# EAGLE board EPC (EAGLE 9.6.2), part 1 of 2
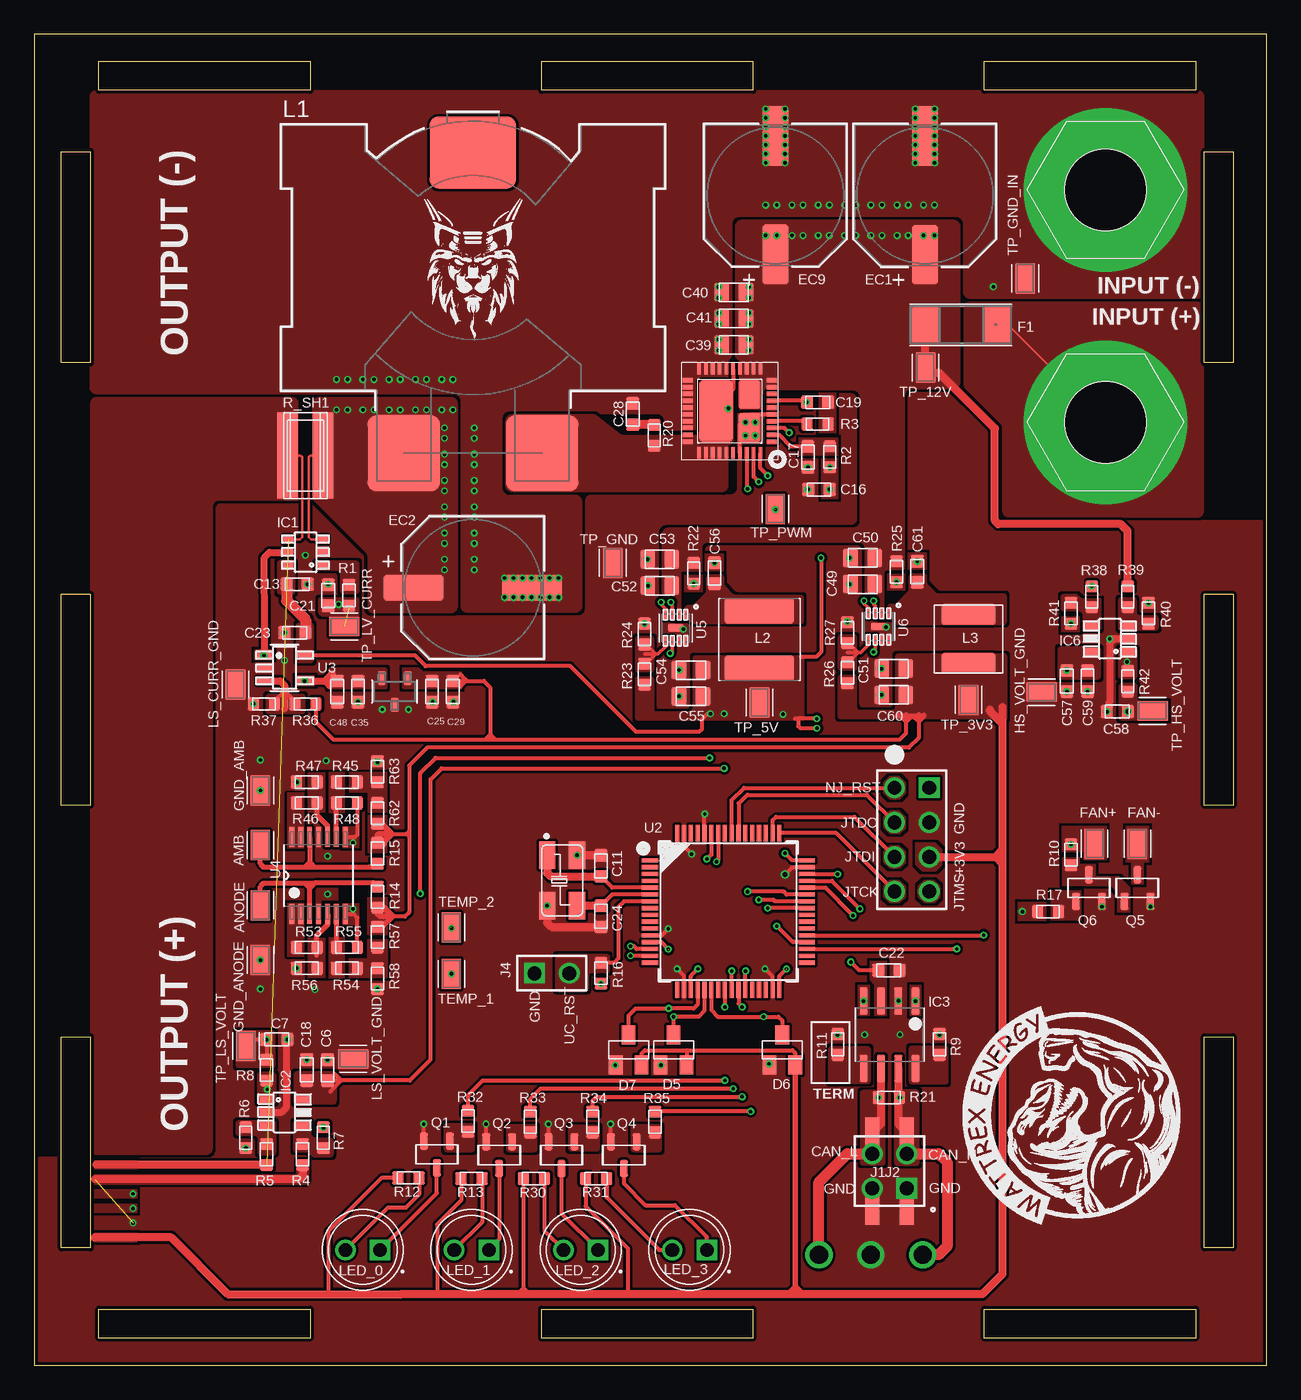
[diagram p0: board, top side]
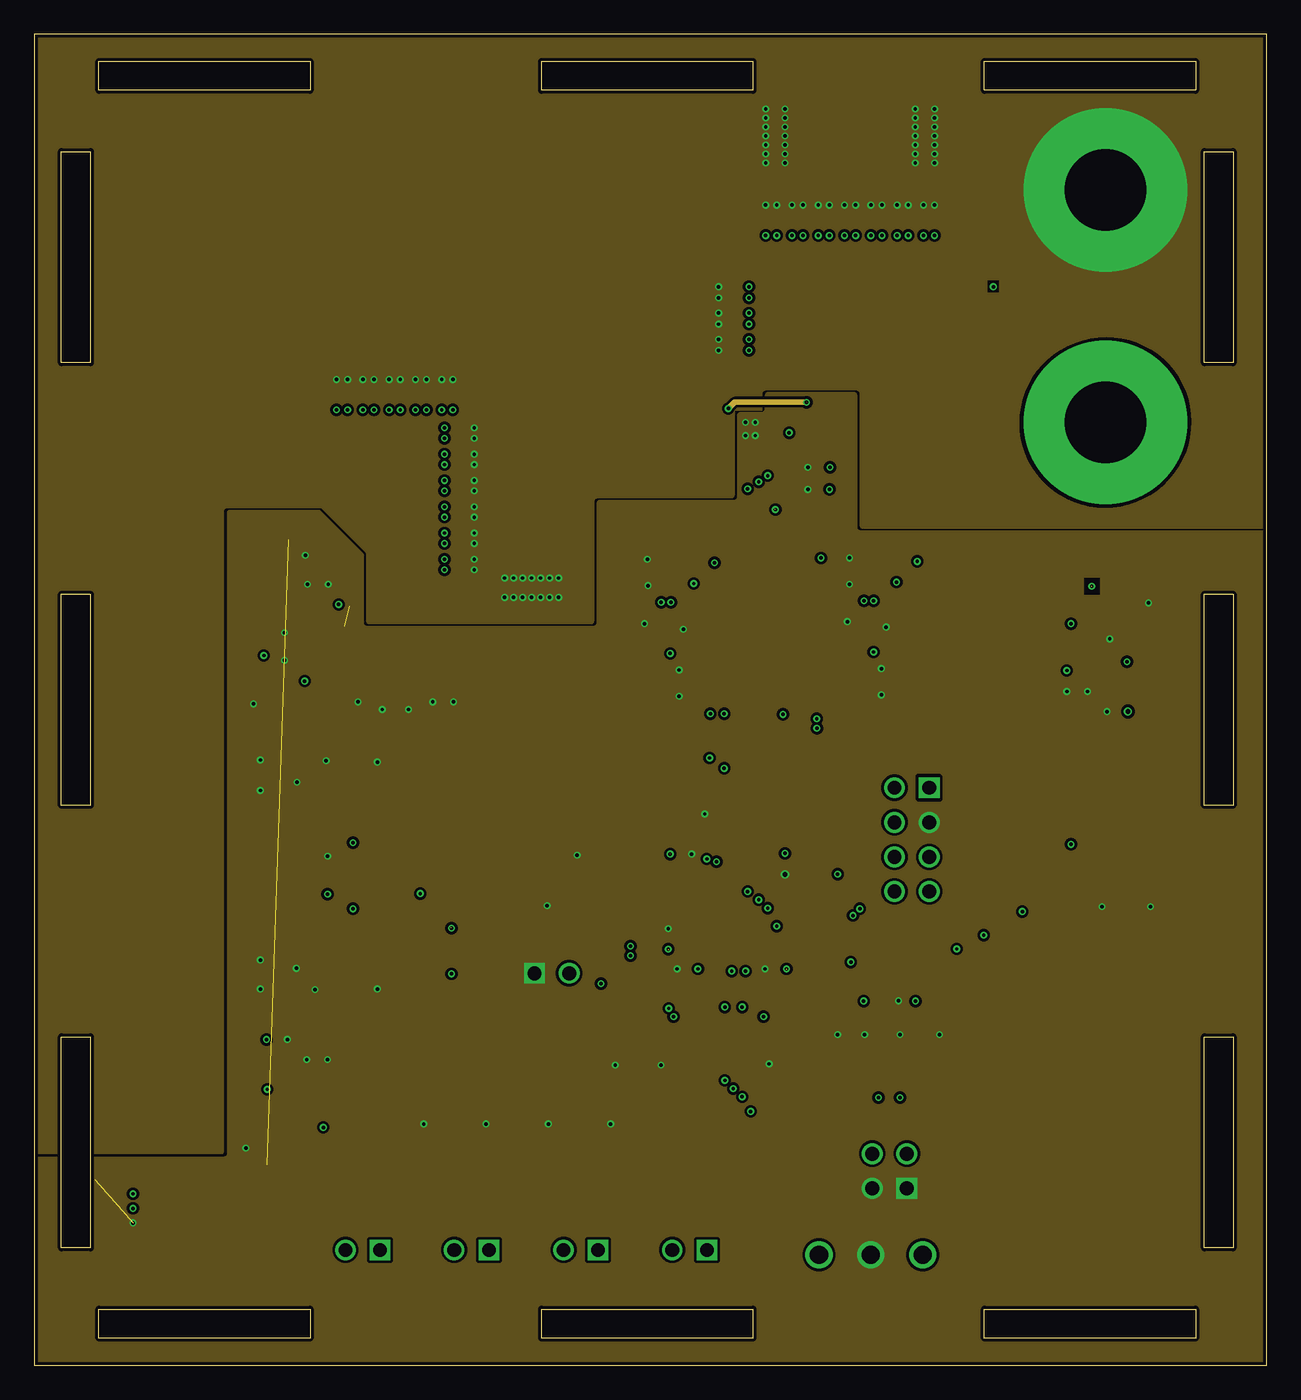
[diagram p1: board, inner layer PGND]
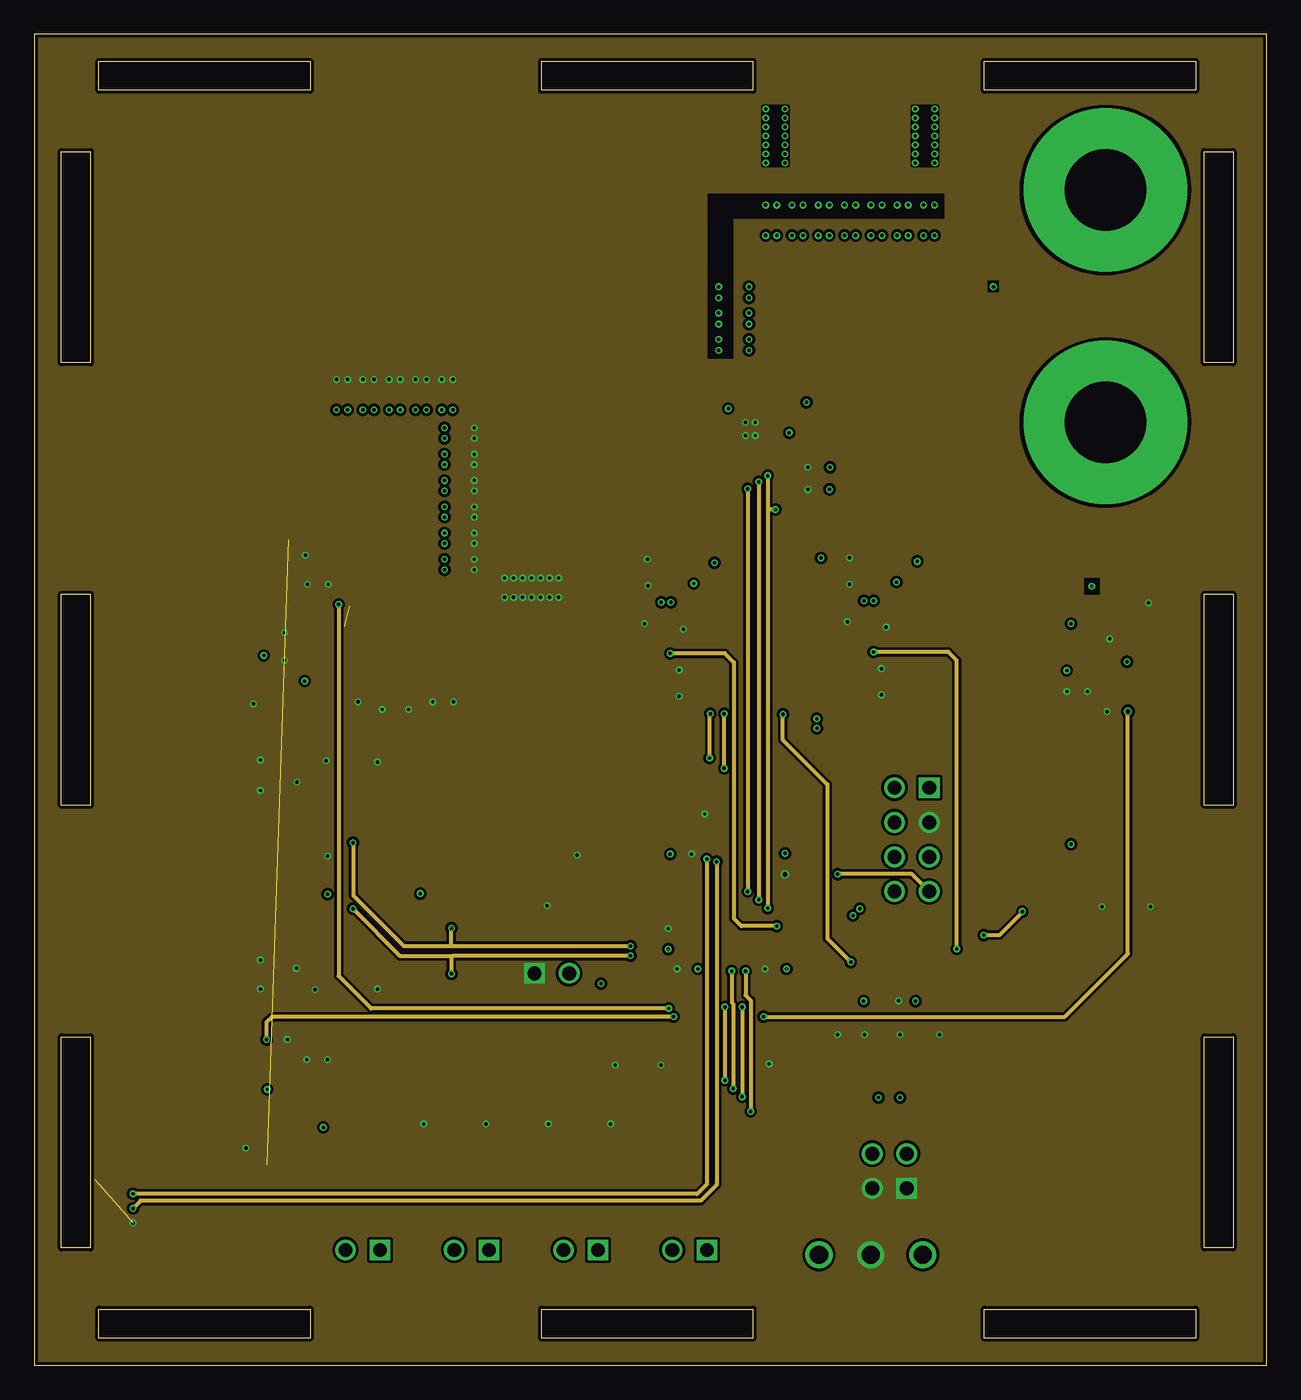
[diagram p2: board, inner layer CGND]
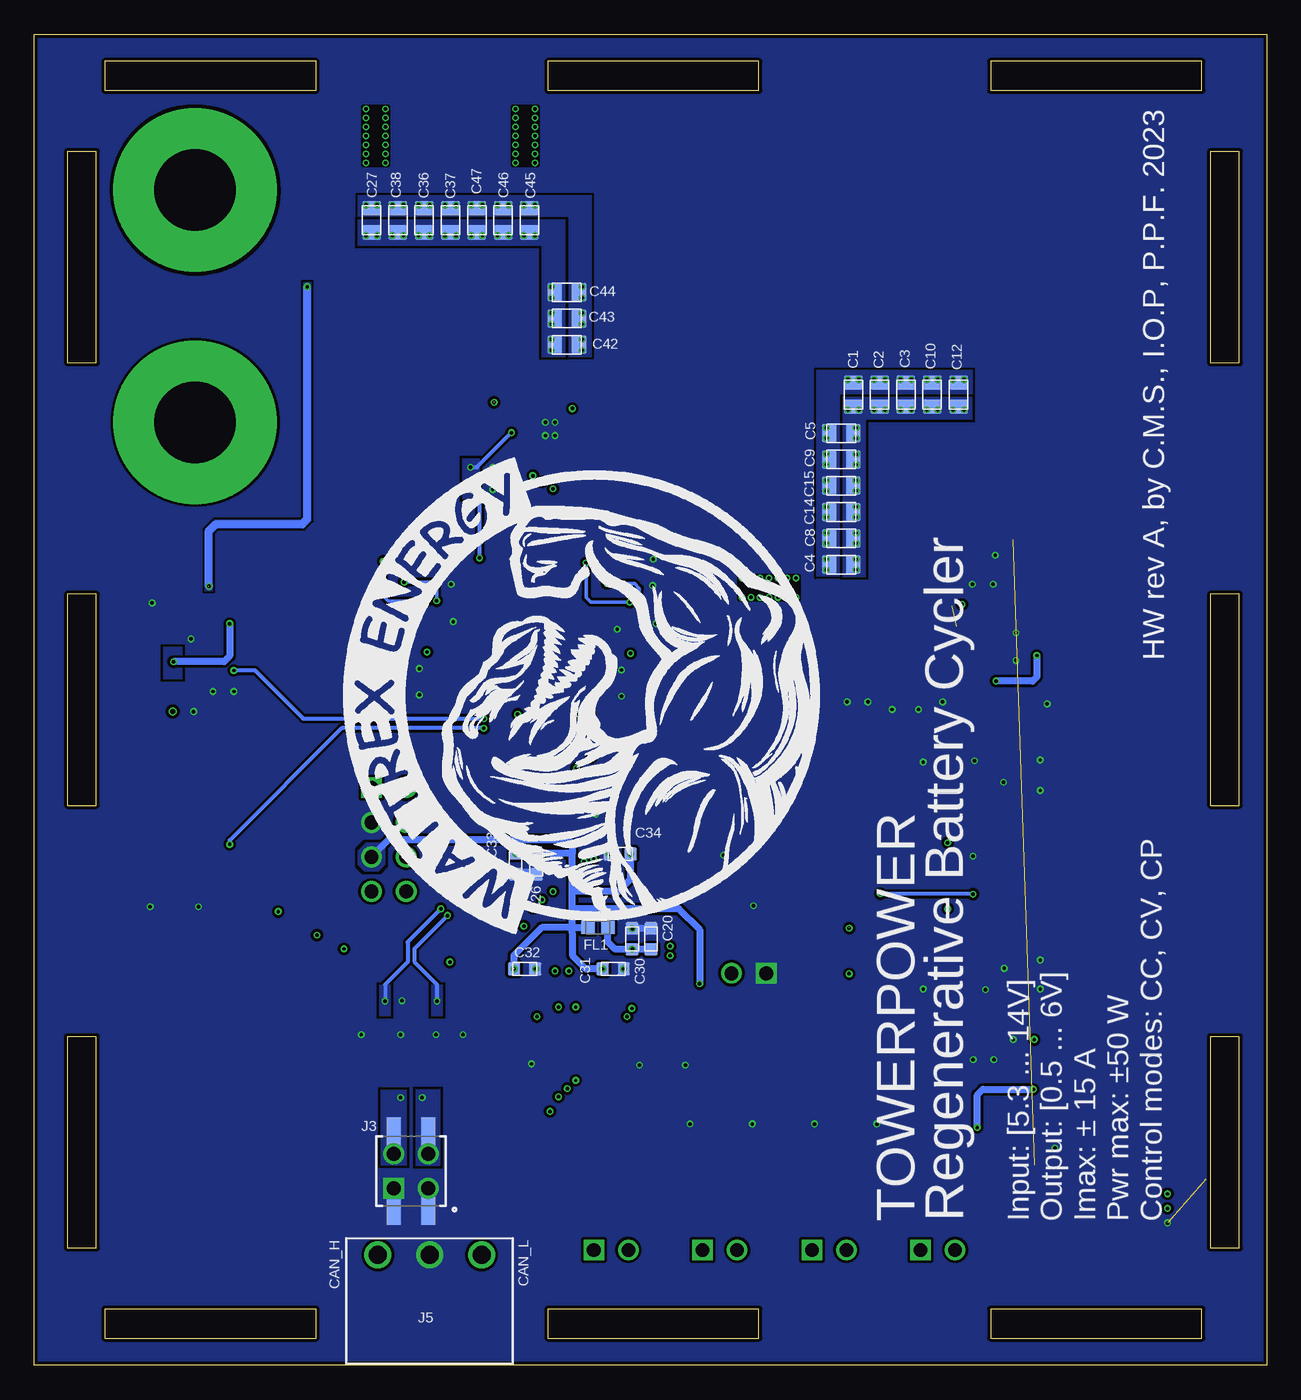
[diagram p3: board, bottom side, seen from below]

Size 90.46 x 97.75 mm. Coordinates in mm from the lower left corner, seen from the top.
Outline: 37.25,2 37.25,4.12 52.75,4.12 52.75,2 37.25,2
Outline: 85.88,73.62 85.88,89.12 88,89.12 88,73.62 85.88,73.62
Outline: 2,73.62 2,89.12 4.12,89.12 4.12,73.62 2,73.62
Outline: 4.75,93.62 4.75,95.75 20.25,95.75 20.25,93.62 4.75,93.62
Outline: 2,8.62 2,24.12 4.12,24.12 4.12,8.62 2,8.62
Outline: 4.75,2 4.75,4.12 20.25,4.12 20.25,2 4.75,2
Outline: 2,41.12 2,56.62 4.12,56.62 4.12,41.12 2,41.12
Outline: 37.25,93.62 37.25,95.75 52.75,95.75 52.75,93.62 37.25,93.62
Outline: 85.88,41.12 85.88,56.62 88,56.62 88,41.12 85.88,41.12
Outline: 69.75,2 69.75,4.12 85.25,4.12 85.25,2 69.75,2
Outline: 85.88,8.62 85.88,24.12 88,24.12 88,8.62 85.88,8.62
Outline: 69.75,93.62 69.75,95.75 85.25,95.75 85.25,93.62 69.75,93.62
Outline: 0,97.75 0,0 90.46,0 90.46,97.75 0,97.75
Copper layers (1+2*3+16): PWR 0.035mm / dielectric 0.36mm / PGND 0.07mm / dielectric 0.71mm / CGND 0.07mm / dielectric 0.36mm / SGND 0.035mm
Design rules "eC_4Layer_PClass4_BaseCopperO35-I70 *": minimum track width 0.2mm, minimum drill 0.25mm, track to track 0.2mm, track to pad 0.2mm, pad to pad 0.2mm, via to via 0.2mm, smd to smd 0mil, copper to edge 0.25mm, drill to drill 0.25mm, minimum pad ring 0.2mm, minimum via ring 0.125mm, stop-mask expansion 0mil, vias tented up to drill 0.45mm, thermal gap 0.2mm
tRestrict: 8 lines
bRestrict: 24 lines

## Footprints (pad centres in the part's own frame; a part is rotated, then mirrored left to right if it is on the bottom)
TP_S2751-46R = smd 2.2 x 1.4: 1 0,0
CAP_0805 = smd 1.1 x 1.38: 1 -0.885,0; 2 0.885,0
CAP_0603 = smd 0.92 x 0.97: 1 -0.775,0; 2 0.775,0
BAT54S = smd 1.4 x 1: A -1.1,0.95; AK 1.1,0; K -1.1,-0.95
WCAP-PSLC_10X12.4(DXL) = smd 4.4 x 1.9: 1 4.35,0; 2 -4.35,0
FUSE_SF-2410FP010T-2 = smd 2.099 x 2.742: 1 -2.65,0; 2 2.65,0
FERR_0603_600OHM = smd 1 x 0.97: 1 -0.735,0; 2 0.735,0
SOT-23-6 = smd 0.8 x 0.55: 1 -1.275,0.95; 2 -1.275,0; 3 -1.275,-0.95; 4 1.275,-0.95; 5 1.275,0; 6 1.275,0.95
SOT-23-5 = smd 1.15 x 0.6: 1 -1.3,0.95; 2 -1.3,0; 3 -1.3,-0.95; 4 1.3,-0.95; 5 1.3,0.95
MAX3059ASA = smd 1.97 x 0.6: 1 -2.47,1.905; 2 -2.47,0.635; 3 -2.47,-0.635; 4 -2.47,-1.905; 5 2.47,-1.905; 6 2.47,-0.635; 7 2.47,0.635; 8 2.47,1.905
SOT-23 = smd 0.528 x 0.984: 1 -0.95,-0.979; 2 0.95,-0.979; 3 0,0.979
SSM-102-T-DV = smd 1.02 x 2.22: 01 1.27,-2.825; 02 1.27,2.825; 03 -1.27,-2.825; 04 -1.27,2.825
TSW-125-19-T-D = drill 1.02 pad 1.37 square: 01 1.27,1.27 | drill 1.02 pad 1.37: 02 -1.27,1.27; 03 1.27,-1.27; 04 -1.27,-1.27
2_POS_HEADER = drill 1.02 pad 1.37 square: 01 0,0 | drill 1.02 pad 1.37: 02 2.54,0
CONN_3_POS = drill 1.33 pad 1.995: 1 0,0; 2 3.81,0; 3 7.62,0
JTAG = drill 1.02 pad 1.37: 01 -3.8,-1.26; 02 -1.26,-1.26; 03 1.28,-1.26; 04 3.82,-1.26; 05 3.82,1.28; 06 1.28,1.28; 07 -1.26,1.28 | drill 1.02 pad 1.37 square: NC -3.8,1.28
PQ2617BHA-150K = smd 5.334 x 5.588: 1 -5.075,-14.355; 2 5.075,-14.355 | smd 6.35 x 5.283: 3 0,7.72
IND_VLS6045EX-220M = smd 1.9 x 5.1: 1 -2.1,0; 2 2.1,0
IND_VLS5045EX-150M = smd 1.5 x 4: 1 -1.8,0; 2 1.8,0
LED_WP7113ID = drill 1: A 1.27,0 | drill 1 square: C -1.27,0
NX7002AK_215 = smd 1.26 x 0.59: 1 -0.98,0.95; 2 -0.98,-0.95; 3 0.98,0
RES_0603 = smd 0.84 x 0.93: 1 -0.77,0; 2 0.77,0
RES_FCSL64_OHM-M = smd 1.5 x 6.3: 1 -1.299,-0.003; 2 1.299,0.003
RES1020 = smd 1.15 x 5.23: 1 -1.123,0; 2 1.123,0
SPACER_M6X25MM = drill 6 pad 12: P$1 0,0
FDMF6820C = smd 0.35 x 0.85: 1 2.23,2.63; 2 1.73,2.63; 3 1.23,2.63; 4 0.73,2.63; 5 0.23,2.63; 6 -0.27,2.63; 7 -0.77,2.63; 8 -1.27,2.63; 9 -1.77,2.63; 10 -2.27,2.63; 21 -2.27,-3.53; 22 -1.77,-3.53; 23 -1.27,-3.53; 24 -0.77,-3.53; 25 -0.27,-3.53; 26 0.23,-3.53; 27 0.73,-3.53; 28 1.23,-3.53; 29 1.73,-3.53; 30 2.23,-3.53 | smd 0.85 x 0.35: 11 -3.1,1.8; 12 -3.1,1.3; 13 -3.1,0.8; 14 -3.1,0.3; 15 -3.1,-0.2; 16 -3.1,-0.7; 17 -3.1,-1.2; 18 -3.1,-1.7; 19 -3.1,-2.2; 20 -3.1,-2.7; 31 3.06,-2.7; 32 3.06,-2.2; 33 3.06,-1.7; 34 3.06,-1.2; 35 3.06,-0.7; 36 3.06,-0.2; 37 3.06,0.3; 38 3.06,0.8; 39 3.06,1.3; 40 3.06,1.8 | smd 2.1 x 1.6: 41 1.18,1.003; 42 -1.22,1.003 | smd 4.5 x 2.5: 43 -0.02,-1.45
STM32F334R8 = smd 1.194 x 0.305: 1 -5.75,3.75; 2 -5.75,3.25; 3 -5.75,2.75; 4 -5.75,2.25; 5 -5.75,1.75; 6 -5.75,1.25; 7 -5.75,0.75; 8 -5.75,0.25; 9 -5.75,-0.25; 10 -5.75,-0.75; 11 -5.75,-1.25; 12 -5.75,-1.75; 13 -5.75,-2.25; 14 -5.75,-2.75; 15 -5.75,-3.25; 16 -5.75,-3.75; 33 5.75,-3.75; 34 5.75,-3.25; 35 5.75,-2.75; 36 5.75,-2.25; 37 5.75,-1.75; 38 5.75,-1.25; 39 5.75,-0.75; 40 5.75,-0.25; 41 5.75,0.25; 42 5.75,0.75; 43 5.75,1.25; 44 5.75,1.75; 45 5.75,2.25; 46 5.75,2.75; 47 5.75,3.25; 48 5.75,3.75 | smd 0.305 x 1.194: 17 -3.75,-5.75; 18 -3.25,-5.75; 19 -2.75,-5.75; 20 -2.25,-5.75; 21 -1.75,-5.75; 22 -1.25,-5.75; 23 -0.75,-5.75; 24 -0.25,-5.75; 25 0.25,-5.75; 26 0.75,-5.75; 27 1.25,-5.75; 28 1.75,-5.75; 29 2.25,-5.75; 30 2.75,-5.75; 31 3.25,-5.75; 32 3.75,-5.75; 49 3.75,5.75; 50 3.25,5.75; 51 2.75,5.75; 52 2.25,5.75; 53 1.75,5.75; 54 1.25,5.75; 55 0.75,5.75; 56 0.25,5.75; 57 -0.25,5.75; 58 -0.75,5.75; 59 -1.25,5.75; 60 -1.75,5.75; 61 -2.25,5.75; 62 -2.75,5.75; 63 -3.25,5.75; 64 -3.75,5.75
TL071HIDBVR = smd 1.172 x 0.508: 1 -1.462,0.95; 2 -1.462,0; 3 -1.462,-0.95; 4 1.462,-0.95; 5 1.462,0.95
LM224APT = smd 1.473 x 0.356: 1 -2.819,1.956; 2 -2.819,1.295; 3 -2.819,0.66; 4 -2.819,0; 5 -2.819,-0.66; 6 -2.819,-1.295; 7 -2.819,-1.956; 8 2.819,-1.956; 9 2.819,-1.295; 10 2.819,-0.66; 11 2.819,0; 12 2.819,0.66; 13 2.819,1.295; 14 2.819,1.956
WDFN-8L = smd 0.76 x 0.27: 1 -0.97,0.75; 2 -0.97,0.25; 3 -0.97,-0.25; 4 -0.97,-0.75; 5 0.97,-0.75; 6 0.97,-0.25; 7 0.97,0.25; 8 0.97,0.75 | smd 0.52 x 1.12: 9 0,0
MCSJK-7I-8.00-10-30-60-B-30 = smd 2 x 1.2: #1 -1.9,-0.95; #3 1.8,1.25; GND -1.9,1.25; GND_2 1.8,-0.95

## Placement (x,y rotation side)
AMB  TP_S2751-46R  [TP_S2751-46R]  16.61,38.2 270 top
ANODE  TP_S2751-46R  [TP_S2751-46R]  16.61,33.78 270 top
C1  22uF / 0805  [CAP_0805]  30.33,71.28 90 bottom
C2  22uF / 0805  [CAP_0805]  28.4,71.28 90 bottom
C3  22uF / 0805  [CAP_0805]  26.47,71.28 90 bottom
C4  22uF / 0805  [CAP_0805]  31.22,58.79 180 bottom
C5  22uF / 0805  [CAP_0805]  31.22,68.45 180 bottom
C6  100nF  [CAP_0603]  21.54,21.69 90 top
C7  Cf  [CAP_0603]  17.83,23.93 0 top
C8  22uF / 0805  [CAP_0805]  31.22,60.72 180 bottom
C9  22uF / 0805  [CAP_0805]  31.22,66.52 180 bottom
C10  22uF / 0805  [CAP_0805]  24.54,71.28 90 bottom
C11  22pF  [CAP_0603]  41.61,36.68 90 top
C12  22uF / 0805  [CAP_0805]  22.61,71.28 90 bottom
C13  100nF  [CAP_0603]  19.31,57.36 0 top
C14  22uF / 0805  [CAP_0805]  31.22,62.65 180 bottom
C15  22uF / 0805  [CAP_0805]  31.22,64.58 180 bottom
C16  1uF  [CAP_0603]  57.61,64.32 180 top
C17  1uF  [CAP_0603]  56.8,66.7 270 top
C18  1uF  [CAP_0603]  20.01,21.69 90 top
C19  100nF  [CAP_0603]  57.5,70.72 180 top
C20  100nF  [CAP_0603]  45.18,31.32 90 bottom
C21  Cf  [CAP_0603]  21.59,56.54 90 top
C22  100nF  [CAP_0603]  62.74,29.01 0 top
C23  100nF  [CAP_0603]  19.15,53.8 180 top
C24  22pF  [CAP_0603]  41.61,32.97 270 top
C25  100nF  [CAP_0603]  29.21,49.48 270 top
C26  4.7uF  [CAP_0603]  53.6,36.83 270 bottom
C27  22uF / 0805  [CAP_0805]  65.68,84.07 90 bottom
C28  Csnb  [CAP_0603]  43.94,69.85 90 top
C29  100nF  [CAP_0603]  30.73,49.48 270 top
C30  1uF  [CAP_0603]  46.56,31.32 90 bottom
C31  100nF  [CAP_0603]  47.96,29.11 0 bottom
C32  100nF  [CAP_0603]  54.46,29.11 0 bottom
C33  100nF  [CAP_0603]  55.12,36.83 270 bottom
C34  100nF  [CAP_0603]  47.45,37.54 180 bottom
C35  100nF  [CAP_0603]  23.77,49.48 270 top
C36  22uF / 0805  [CAP_0805]  61.83,84.08 90 bottom
C37  22uF / 0805  [CAP_0805]  59.89,84.08 90 bottom
C38  22uF / 0805  [CAP_0805]  63.76,84.08 90 bottom
C39  22uF / 0805  [CAP_0805]  51.36,74.93 180 top
C40  22uF / 0805  [CAP_0805]  51.36,78.79 180 top
C41  22uF / 0805  [CAP_0805]  51.36,76.86 180 top
C42  22uF / 0805  [CAP_0805]  51.36,74.93 0 bottom
C43  22uF / 0805  [CAP_0805]  51.36,76.86 0 bottom
C44  22uF / 0805  [CAP_0805]  51.36,78.79 0 bottom
C45  22uF / 0805  [CAP_0805]  54.1,84.07 90 bottom
C46  22uF / 0805  [CAP_0805]  56.03,84.07 90 bottom
C47  22uF / 0805  [CAP_0805]  57.96,84.07 90 bottom
C48  100nF  [CAP_0603]  22.25,49.48 270 top
C49  10uF / 0805  [CAP_0805]  60.81,57.36 180 top
C50  10uF / 0805  [CAP_0805]  60.81,59.29 180 top
C51  22uF / 0805  [CAP_0805]  63.1,51.16 180 top
C52  10uF / 0805  [CAP_0805]  45.92,57.25 180 top
C53  10uF / 0805  [CAP_0805]  45.92,59.18 180 top
C54  22uF / 0805  [CAP_0805]  48.21,51.06 180 top
C55  22uF / 0805  [CAP_0805]  48.21,49.13 180 top
C56  10nF  [CAP_0603]  49.94,58.17 90 top
C57  100nF  [CAP_0603]  75.8,50.24 270 top
C58  Cf  [CAP_0603]  79.5,48.01 180 top
C59  1uF  [CAP_0603]  77.32,50.24 270 top
C60  22uF / 0805  [CAP_0805]  63.1,49.23 180 top
C61  10nF  [CAP_0603]  64.82,58.27 90 top
D5  BAT54S  [BAT54S]  46.94,23.16 90 top
D6  BAT54S  [BAT54S]  54.91,23.16 90 top
D7  BAT54S  [BAT54S]  43.64,23.16 90 top
EC1  100uF  [WCAP-PSLC_10X12.4(DXL)]  65.38,85.9 270 top
EC2  100uF  [WCAP-PSLC_10X12.4(DXL)]  32.21,57.1 180 top
EC9  100uF  [WCAP-PSLC_10X12.4(DXL)]  54.41,85.91 270 top
F1  FUSE_SF-2410FP010T-2FUSE_SF_6P1X2P6_BRN-M  [FUSE_SF-2410FP010T-2]  68.07,76.41 180 top
FAN+  TP_S2751-46R  [TP_S2751-46R]  77.83,38.3 270 top
FAN-  TP_S2751-46R  [TP_S2751-46R]  80.98,38.3 90 top
FL1  600Ohm/100MHz  [FERR_0603_600OHM]  49.07,32.16 180 bottom
GND_AMB  TP_S2751-46R  [TP_S2751-46R]  16.61,42.22 90 top
GND_ANODE  TP_S2751-46R  [TP_S2751-46R]  16.61,29.77 270 top
HS_VOLT_GND  TP_S2751-46R  [TP_S2751-46R]  73.96,49.43 0 top
IC1  INA181A2IDBVTDBV0006A_L  [SOT-23-6]  19.92,59.69 180 top
IC2  TSV7721ILT  [SOT-23-5]  18.39,18.59 0 top
IC3  MAX3059ASA  [MAX3059ASA]  62.79,24.29 270 top
IC4  MAX6018AEUR16+T21-0051H_MXM-L  [SOT-23]  26.47,49.48 180 top
IC6  TSV7721ILT  [SOT-23-5]  78.94,53.34 180 top
J1  SSM-102-T-DV  [SSM-102-T-DV]  62.79,14.28 0 top
J2  TSW-125-19-T-D  [TSW-125-19-T-D]  62.79,14.28 270 top
J3  SSM-102-T-DV  [SSM-102-T-DV]  62.79,14.28 0 bottom
J4  2_POS_HEADER  [2_POS_HEADER]  36.73,28.8 0 top
J5  CONN_3_POS  [CONN_3_POS]  65.23,8.13 0 bottom
JTAG1  JTAG  [JTAG]  64.41,38.62 270 top
L1  PQ2617BHA-150K  [PQ2617BHA-150K]  32.21,81.33 0 top
L2  VLS6045EX-220M  [IND_VLS6045EX-220M]  53.24,53.29 270 top
L3  VLS5045EX-150M  [IND_VLS5045EX-150M]  68.58,53.34 270 top
LED_0  WP7113ID  [LED_WP7113ID]  24.13,8.48 180 top
LED_1  WP7113ID  [LED_WP7113ID]  32.11,8.48 180 top
LED_2  WP7113ID  [LED_WP7113ID]  40.13,8.48 180 top
LED_3  WP7113ID  [LED_WP7113ID]  48.11,8.48 180 top
LS_CURR_GND  TP_S2751-46R  [TP_S2751-46R]  14.78,49.99 90 top
LS_VOLT_GND  TP_S2751-46R  [TP_S2751-46R]  23.42,22.5 0 top
Q1  NX7002AK_215  [NX7002AK_215]  29.57,15.49 270 top
Q2  NX7002AK_215  [NX7002AK_215]  34.14,15.44 270 top
Q3  NX7002AK_215  [NX7002AK_215]  38.71,15.44 270 top
Q4  NX7002AK_215  [NX7002AK_215]  43.28,15.44 270 top
Q5  PJA3430  [NX7002AK_215]  80.98,35.05 90 top
Q6  NX7002AK_215  [NX7002AK_215]  77.42,35.05 90 top
R1  Rf  [RES_0603]  23.12,56.54 270 top
R2  10Ω  [RES_0603]  58.39,66.7 270 top
R3  2Ω  [RES_0603]  57.5,69.12 0 top
R4  150kΩ  [RES_0603]  19.71,15.5 90 top
R5  150kΩ  [RES_0603]  17.07,15.5 90 top
R6  82kΩ  [RES_0603]  15.54,16.71 90 top
R7  82kΩ  [RES_0603]  21.23,16.71 90 top
R8  Rf  [RES_0603]  17.07,21.69 90 top
R9  51kΩ  [RES_0603]  66.45,23.57 270 top
R10  10kΩ  [RES_0603]  76.1,37.49 90 top
R11  R0  [RES_0603]  58.98,23.57 270 top
R12  1kΩ  [RES_0603]  27.48,13.77 180 top
R13  1kΩ  [RES_0603]  32.11,13.72 180 top
R14  3.32kΩ  [RES_0603]  25.2,34.39 90 top
R15  3.32kΩ  [RES_0603]  25.2,37.59 270 top
R16  10kΩ  [RES_0603]  41.61,28.8 270 top
R17  1kΩ  [RES_0603]  74.42,33.32 0 top
R19  FCSL64R002GERRES_FCSL64_OHM-M  [RES_FCSL64_OHM-M]  19.91,66.8 180 top
R20  Rsnb  [RES_0603]  45.52,68.28 90 top
R21  120Ω  [RES_0603]  62.74,19.66 0 top
R22  100kΩ  [RES_0603]  48.41,58.17 270 top
R23  120kΩ  [RES_0603]  44.81,50.75 270 top
R24  22kΩ  [RES_0603]  44.81,53.7 270 top
R25  100kΩ  [RES_0603]  63.3,58.27 270 top
R26  110kΩ  [RES_0603]  59.69,50.85 270 top
R27  36kΩ  [RES_0603]  59.69,53.8 270 top
R30  1kΩ  [RES_0603]  36.68,13.72 180 top
R31  1kΩ  [RES_0603]  41.25,13.72 180 top
R32  1kΩ  [RES_0603]  31.85,17.93 270 top
R33  1kΩ  [RES_0603]  36.42,17.88 270 top
R34  1kΩ  [RES_0603]  41,17.88 270 top
R35  1kΩ  [RES_0603]  45.57,17.88 270 top
R36  10kΩ  [RES_0603]  19.91,48.57 0 top
R37  10kΩ  [RES_0603]  16.86,48.57 0 top
R38  100kΩ  [RES_0603]  77.62,56.44 270 top
R39  100kΩ  [RES_0603]  80.27,56.44 270 top
R40  22kΩ  [RES_0603]  81.79,55.22 270 top
R41  22kΩ  [RES_0603]  76.1,55.22 270 top
R42  Rf  [RES_0603]  80.27,50.24 270 top
R45  110kΩ  [RES_0603]  22.96,42.83 0 top
R46  110kΩ  [RES_0603]  20.02,41.3 0 top
R47  140kΩ  [RES_0603]  20.02,42.83 0 top
R48  140kΩ  [RES_0603]  22.96,41.3 0 top
R53  110kΩ  [RES_0603]  20.02,30.69 180 top
R54  110kΩ  [RES_0603]  22.96,29.16 180 top
R55  140kΩ  [RES_0603]  22.96,30.69 180 top
R56  140kΩ  [RES_0603]  20.02,29.16 180 top
R57  16.5kΩ  [RES_0603]  25.2,31.45 90 top
R58  2.2kΩ  [RES_0603]  25.2,28.4 90 top
R62  16.5kΩ  [RES_0603]  25.2,40.54 270 top
R63  2.2kΩ  [RES_0603]  25.2,43.59 270 top
R_SH1  WSL10203L000FEA  [RES1020]  19.92,66.8 180 top
SP1  SPACER_M6X25MM  [SPACER_M6X25MM]  78.64,69.24 180 top
SP2  SPACER_M6X25MM  [SPACER_M6X25MM]  78.64,86.31 180 top
TEMP_1  TP_S2751-46R  [TP_S2751-46R]  30.63,28.75 90 top
TEMP_2  TP_S2751-46R  [TP_S2751-46R]  30.63,32.16 270 top
TP_3V3  TP_S2751-46R  [TP_S2751-46R]  68.58,48.87 90 top
TP_5V  TP_S2751-46R  [TP_S2751-46R]  53.24,48.67 90 top
TP_12V  TP_S2751-46R  [TP_S2751-46R]  65.43,73.25 90 top
TP_GND  TP_S2751-46R  [TP_S2751-46R]  42.47,58.93 90 top
TP_GND_IN  TP_S2751-46R  [TP_S2751-46R]  72.75,79.81 270 top
TP_HS_VOLT  TP_S2751-46R  [TP_S2751-46R]  82.09,48.06 0 top
TP_LS_VOLT  TP_S2751-46R  [TP_S2751-46R]  15.54,23.47 90 top
TP_LV_CURR  TP_S2751-46R  [TP_S2751-46R]  22.76,54.25 0 top
TP_PWM  TP_S2751-46R  [TP_S2751-46R]  54.41,62.89 270 top
U1  FDMF6820C  [FDMF6820C]  51.51,70.05 270 top
U2  STM32F334R8T6  [STM32F334R8]  50.95,33.33 0 top
U3  [TL071HIDBVR]  18.39,51.21 0 top
U4  LM224APT  [LM224APT]  20.88,35.97 90 top
U5  RT7251AZQW  [WDFN-8L]  47.09,54.16 270 top
U6  RT7251AZQW  [WDFN-8L]  61.98,54.26 270 top
XTAL1  MCSJK-7I-8.00-10-30-60-B-30  [MCSJK-7I-8.00-10-30-60-B-30]  38.61,35.56 270 top

## Library data of the parts
AMB ANODE FAN+ FAN- GND_AMB GND_ANODE HS_VOLT_GND LS_CURR_GND LS_VOLT_GND TEMP_1 TEMP_2 TP_3V3 TP_5V TP_12V TP_GND TP_GND_IN TP_HS_VOLT TP_LS_VOLT TP_LV_CURR TP_PWM = VRFB_50kW; AVAILABILITY: In Stock; DESCRIPTION: Natural PC Test Point Brass, Tin Plating Surface Mount Mounting Type; MF: Harwin Inc.; MP: S2751-46R; PACKAGE: None; PRICE: None; PURCHASE-URL: https://pricing.snapeda.com/search/part/S2751-46R/?ref=eda
C1-C61 EC1 EC2 EC9 IC3 JTAG1 R1-R17 R20-R27 R30-R42 R45-R48 R53-R58 R62 R63 SP1 SP2 U1 U5 U6 = EPC_V2
D5-D7 = EPC_V2; AVAILABILITY: In Stock; DESCRIPTION: SOT-23 30V 0.2A Diodes Rectifi; MF: ON; MP: BAT54S; PACKAGE: SOT-23-3 ON Semiconductor; PRICE: None
F1 = EPC_V2; COPYRIGHT: Copyright (C) 2023 Ultra Librarian. All rights reserved.; MANUFACTURER_PART_NUMBER: SF-2410FP010T-2; MFR_NAME: Bourns Electronics
FL1 = VRFB_50kW; AVAILABILITY: In Stock; DESCRIPTION: 600 Ohms @ 100MHz 1 Ferrite Bead 0603 (1608 Metric) 500mA 380mOhm; MF: Murata; MP: BLM18AG601SN1D; PACKAGE: 1608 Murata; PRICE: None
IC1 = EPC_V2; COPYRIGHT: Copyright (C) 2022 Ultra Librarian. All rights reserved.; MANUFACTURER_PART_NUMBER: INA181A2IDBVT; MFR_NAME: Texas Instruments; REFDES: RefDes; TYPE: TYPE
IC2 IC6 = EPC_V2; DESCRIPTION: High bandwidth (22MHz) Low offset (200 &#181;V) low-rail 5V Op amp; HEIGHT: 1.45mm; MANUFACTURER_NAME: STMicroelectronics; MANUFACTURER_PART_NUMBER: TSV7721ILT
IC4 = EPC_V2; COPYRIGHT: Copyright (C) 2022 Ultra Librarian. All rights reserved.; MANUFACTURER_PART_NUMBER: MAX6018AEUR16+T; MFR_NAME: Maxim Integrated Products
J1 J3 = EPC_V2; AVAILABILITY: In Stock; DESCRIPTION: 4 Position Receptacle, Pass Through Connector 0.100 (2.54mm) Surface Mount Tin; MF: Samtec; MP: SSM-102-T-DV; PACKAGE: None; PRICE: None; PURCHASE-URL: https://pricing.snapeda.com/search/part/SSM-102-T-DV/?ref=eda
J2 = EPC_V2; AVAILABILITY: In Stock; DESCRIPTION: Connector Header Through Hole 50 position 0.100 (2.54mm); MF: Samtec; MP: TSW-125-19-T-D; PACKAGE: None; PRICE: None; PURCHASE-URL: https://pricing.snapeda.com/search/part/TSW-125-19-T-D/?ref=eda
J4 = VRFB_50kW; AVAILABILITY: In Stock; DESCRIPTION: Connector Header Through Hole 2 position 0.100 (2.54mm); MF: Samtec; MP: TSW-102-14-H-S; PACKAGE: None; PRICE: None; PURCHASE-URL: https://pricing.snapeda.com/search/part/TSW-102-14-H-S/?ref=eda
J5 = VRFB_50kW; DESCRIPTION: RS PRO 3.81mm Pitch Right Angle PCB Terminal Block, PCB Header, PCB Mount, 3 Way; HEIGHT: 7mm; MANUFACTURER_NAME: RS Components; MANUFACTURER_PART_NUMBER: CTB932HE/3; RS_PART_NUMBER: 8971133; RS_PRICE-STOCK: https://uk.rs-online.com/web/p/products/8971133
L1 = EPC_V2; COPYRIGHT: Copyright (C) 2022 Ultra Librarian. All rights reserved.; MANUFACTURER_PART_NUMBER: PQ2617BHA-100K; MFR_NAME: Bourns Electronics
L2 = EPC_V2; AVAILABILITY: In Stock; DESCRIPTION: 22 µH Shielded Drum Core, Wirewound Inductor 1.9 A 105mOhm Nonstandard; MF: TDK; MP: VLS6045EX-220M; PACKAGE: NON STANDARD-2 TDK; PRICE: None; PURCHASE-URL: https://pricing.snapeda.com/search/part/VLS6045EX-220M/?ref=eda
L3 = EPC_V2; AVAILABILITY: In Stock; DESCRIPTION: 15 µH Shielded Drum Core, Wirewound Inductor 1.9 A 143mOhm Max Nonstandard; MF: TDK; MP: VLS5045EX-150M; PACKAGE: NON STANDARD-2 TDK; PRICE: None; PURCHASE-URL: https://pricing.snapeda.com/search/part/VLS5045EX-150M/?ref=eda
LED_0 LED_1-LED_3 = EPC_V2; AVAILABILITY: In Stock; DESCRIPTION: Red 617nm LED Indication - Discrete 2V Radial; MF: Kingbright; MP: WP7113ID; PACKAGE: Radial Kingbright; PRICE: None; PURCHASE-URL: https://pricing.snapeda.com/search/part/WP7113ID/?ref=eda
Q1-Q6 = VRFB_50kW; AVAILABILITY: In Stock; DESCRIPTION: N-channel enhancement mode Field-Effect Transistor (FET) in a small SOT23 (TO-236AB) Surface-Mounted Device (SMD) plastic package using Trench MOSFET technology; MF: Nexperia USA Inc.; MP: NX7002AK,215; PACKAGE: SC-59 Nexperia USA; PRICE: None; PURCHASE-URL: https://pricing.snapeda.com/search/part/NX7002AK,215/?ref=eda
R19 = EPC_V2; COPYRIGHT: Copyright (C) 2023 Ultra Librarian. All rights reserved.; DIGIKEY_PART_NUMBER_1: FCSL64R002GERCT-ND; DIGIKEY_PART_NUMBER_2: FCSL64R002GERDKR-ND; DIGIKEY_PART_NUMBER_3: FCSL64R002GERTR-ND; MANUFACTURER_PART_NUMBER: FCSL64R002GER; MFR_NAME: Ohmite
R_SH1 = EPC_V2; AVAILABILITY: In Stock; DESCRIPTION: 3 mOhms ±1% 2W Chip Resistor Wide 2010 (5025 Metric), 1020 Anti-Sulfur, Automotive AEC-Q200, Current Sense, Moisture Resistant, Pulse Withstanding Metal Element; MF: Vishay; MP: WSL10203L000FEA; PACKAGE: 2550 Vishay; PRICE: None; PURCHASE-URL: https://pricing.snapeda.com/search/part/WSL10203L000FEA/?ref=eda
U2 = EPC_V2; COPYRIGHT: Copyright (C) 2023 Ultra Librarian. All rights reserved.; MANUFACTURER_PART_NUMBER: STM32F334R8T6; MFR_NAME: STMicroelectronics
U3 = EPC_COMPONENTS; COPYRIGHT: Copyright (C) 2022 Ultra Librarian. All rights reserved.; MANUFACTURER_PART_NUMBER: TL071HIDBVR; MFR_NAME: Texas Instruments
U4 = VRFB_50kW; AVAILABILITY: Not in stock; DESCRIPTION: General Purpose Amplifier 4 Circuit 14-TSSOP; MF: STMicroelectronics; MP: LM224APT; PACKAGE: TSSOP-14 STMicroelectronics; PRICE: None
XTAL1 = EPC_V2; XTAL: MCSJK-6G-8.00

## Nets
+3V3: C25.1 C26.1 C29.1 C31.1 C32.1 C33.1 C34.1 C51.1 C60.1 D5.K D6.K D7.K FL1.2 IC4.1 JTAG1.06 L3.2 R12.2 R13.2 R14.1 R15.1 R16.2 R26.2 R30.2 R31.2 R36.2 R57.2 R62.2 TP_3V3.1 U2.19 U2.32 U2.48 U2.64
+5V: C6.1 C13.1 C16.1 C18.1 C22.1 C23.1 C54.1 C55.1 C57.1 C59.1 FAN+.1 IC1.6 IC2.5 IC3.3 IC6.5 L2.2 R2.2 R10.2 R23.2 TP_5V.1 U1.3 U3.5 U4.4
+12V: C27.1 C36.1 C37.1 C38.1 C39.1 C40.1 C41.1 C42.1 C43.1 C44.1 C45.1 C46.1 C47.1 C49.1 C50.1 C52.1 C53.1 EC1.1 EC9.1 F1.2 R22.1 R25.1 R39.1 TP_12V.1 U1.9 U1.10 U1.11 U1.12 U1.13 U1.14 U1.42 U5.2 U6.2
CAN_H: IC3.7 J1.02 J2.02 J3.04 J5.1 R21.2
CAN_L: IC3.6 J1.04 J2.04 J3.02 J5.3 R21.1
CAN_RX: IC3.4 U2.44
CAN_TX: IC3.1 U2.45
EXT_TEMP_1: R55.1 TEMP_1.1 U2.15 U4.7
EXT_TEMP_2: R48.2 TEMP_2.1 U2.14 U4.8
FAN_CTRL: R17.1 U2.37
HS_VOLT: C58.1 D6.AK R42.2 TP_HS_VOLT.1 U2.22
LED0: R32.1 U2.24
LED1: R33.1 U2.25
LED2: R34.1 U2.26
LED3: R35.1 U2.27
LS_CURR: C21.1 D7.AK R1.2 TP_LV_CURR.1 U2.20
LS_VOLT: C7.1 D5.AK R8.2 TP_LS_VOLT.1 U2.21
N$1: IC1.1 R1.1
N$2: C19.1 R3.2
N$3: R3.1 U1.4
N$5: IC2.4 R4.2 R7.1
N$6: IC2.3 R5.2 R6.2
N$7: IC2.1 R7.2 R8.1
N$8: C28.1 R20.2
N$9: Q5.1 Q6.3 R10.1
N$11: FAN-.1 Q5.3
N$13: IC6.4 R38.2 R41.1
N$14: IC6.3 R39.2 R40.2
N$15: IC6.1 R41.2 R42.1
N$18: Q6.1 R17.2
N$21: R25.2 U6.4
N$22: C61.1 L3.1 U6.1
N$23: R26.1 R27.2 U6.5
N$24: C61.2 U6.3
N$25: R22.2 U5.4
N$26: C56.1 L2.1 U5.1
N$27: R23.1 R24.2 U5.5
N$28: C56.2 U5.3
N$38: R45.1 R48.1 U4.9
N$39: IC3.8 R9.2
N$40: IC3.5 R11.2
N$41: LED_0.A R12.1
N$42: LED_0.C Q1.3
N$43: LED_1.C Q2.3
N$44: LED_1.A R13.1
N$45: LED_2.A R30.1
N$46: LED_2.C Q3.3
N$47: LED_3.C Q4.3
N$48: LED_3.A R31.1
N$49: Q1.1 R32.2
N$50: R46.2 R47.2 U4.10
N$51: Q2.1 R33.2
N$53: Q3.1 R34.2
N$55: Q4.1 R35.2
N$56: R36.1 R37.2 U3.3
N$57: F1.1 SP1.P$1
N$58: R53.1 R56.1 U4.5
N$59: R54.2 R55.2 U4.6
N$60: R54.1 R57.1 R58.2
N$61: R45.2 R62.1 R63.2
NTC_1: ANODE.1 R14.2 U4.3
NTC_2: AMB.1 R15.2 U4.12
OUT_DISABLE: U1.39 U2.42
PWM_OUT: TP_PWM.1 U1.40 U2.41
RCC_OSC_IN: C11.1 U2.5 XTAL1.#1
RCC_OSC_OUT: C24.1 U2.6 XTAL1.#3
REF_1V65: C35.1 C48.1 IC1.5 IC4.2 U3.1 U3.4
SCL: U2.58
SDA: U2.59
SGND: C1.2 C2.2 C3.2 C4.2 C5.2 C6.2 C7.2 C8.2 C9.2 C10.2 C11.2 C12.2 C13.2 C14.2 C15.2 C16.2 C17.2 C18.2 C20.2 C21.2 C22.2 C23.2 C24.2 C25.2 C26.2 C27.2 C28.2 C29.2 C30.2 C31.2 C32.2 C33.2 C34.2 C35.2 C36.2 C37.2 C38.2 C39.2 C40.2 C41.2 C42.2 C43.2 C44.2 C45.2 C46.2 C47.2 C48.2 C49.2 C50.2 C51.2 C52.2 C53.2 C54.2 C55.2 C57.2 C58.2 C59.2 C60.2 D5.A D6.A D7.A EC1.2 EC2.2 EC9.2 GND_AMB.1 GND_ANODE.1 HS_VOLT_GND.1 IC1.2 IC2.2 IC3.2 IC4.3 IC6.2 J1.01 J1.03 J2.01 J2.03 J3.01 J3.03 J4.01 J5.2 JTAG1.07 LS_CURR_GND.1 LS_VOLT_GND.1 Q1.2 Q2.2 Q3.2 Q4.2 Q5.2 Q6.2 R4.1 R6.1 R9.1 R11.1 R24.1 R27.1 R37.1 R38.1 R40.1 R47.1 R56.2 R58.1 R63.1 SP2.P$1 TP_GND.1 TP_GND_IN.1 U1.5 U1.16 U1.17 U1.18 U1.19 U1.20 U1.21 U1.22 U1.23 U1.24 U1.25 U1.26 U1.27 U1.28 U1.37 U1.41 U2.12 U2.18 U2.31 U2.47 U2.60 U2.63 U3.2 U4.11 U5.7 U5.8 U5.9 U6.7 U6.8 U6.9 XTAL1.GND XTAL1.GND_2
STATUS_3V3: U2.35 U6.6
STATUS_5V0: U2.36 U5.6
SW: C19.2 L1.2 R20.1 U1.7 U1.15 U1.29 U1.30 U1.31 U1.32 U1.33 U1.34 U1.35 U1.43
SYS_JTCK-SWCLK: JTAG1.04 U2.49
SYS_JTDI: JTAG1.03 U2.50
SYS_JTDO-TRACESWO: JTAG1.02 U2.55
SYS_JTMS-SWDIO: JTAG1.05 U2.46
SYS_NJTRST: JTAG1.01 U2.56
T_AMP_1_OUT_1: R53.2 U4.1 U4.2
T_AMP_1_OUT_4: R46.1 U4.13 U4.14
THERMAL_WARN: U1.38 U2.43
UC_NRST: J4.02 R16.1 U2.7
V_BAT: IC1.4 R5.1 R19.2 R_SH1.2
V_OUT: C1.1 C2.1 C3.1 C4.1 C5.1 C8.1 C9.1 C10.1 C12.1 C14.1 C15.1 EC2.1 IC1.3 L1.1 R19.1 R_SH1.1
VBAT: U2.1
VCIN: C17.1 R2.1 U1.2
VDDA: C20.1 C30.1 FL1.1 U2.13